# Altium PCB PCB1.PcbDoc
Units mil, origin at the board's own origin, x right, y up, seen from the top; angles counter-clockwise.
Board outline 3540 x 3540 mil, 2 copper layers (Top Layer, Bottom Layer), stack 60.4 mil thick; 35 components, 15 nets, 173 pads, 5 vias.
Unrouted connection lines stored in the file: 81.
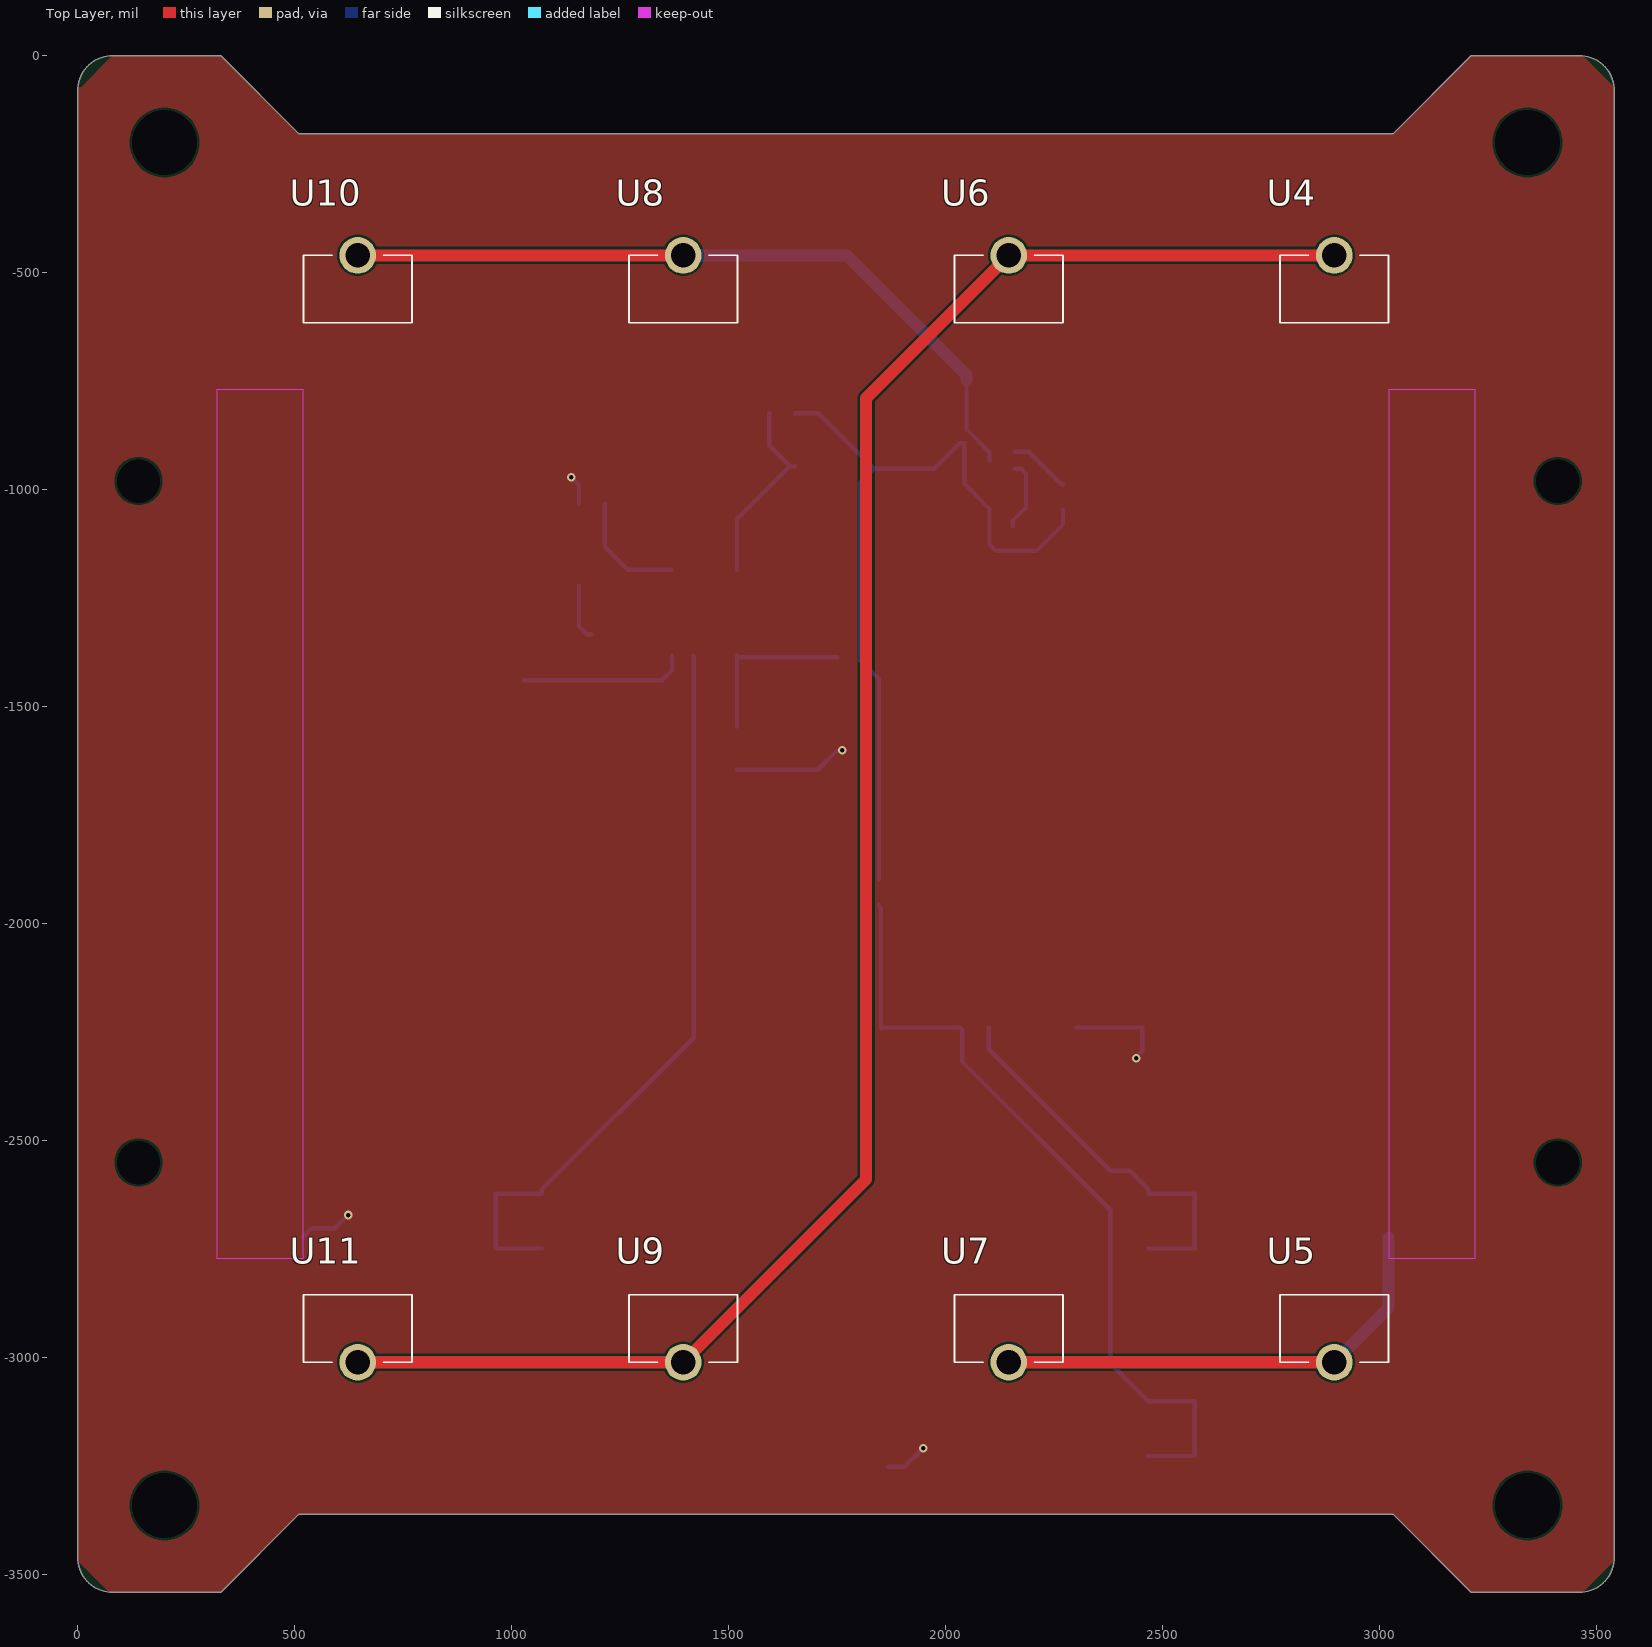
[diagram p0: Top Layer view]
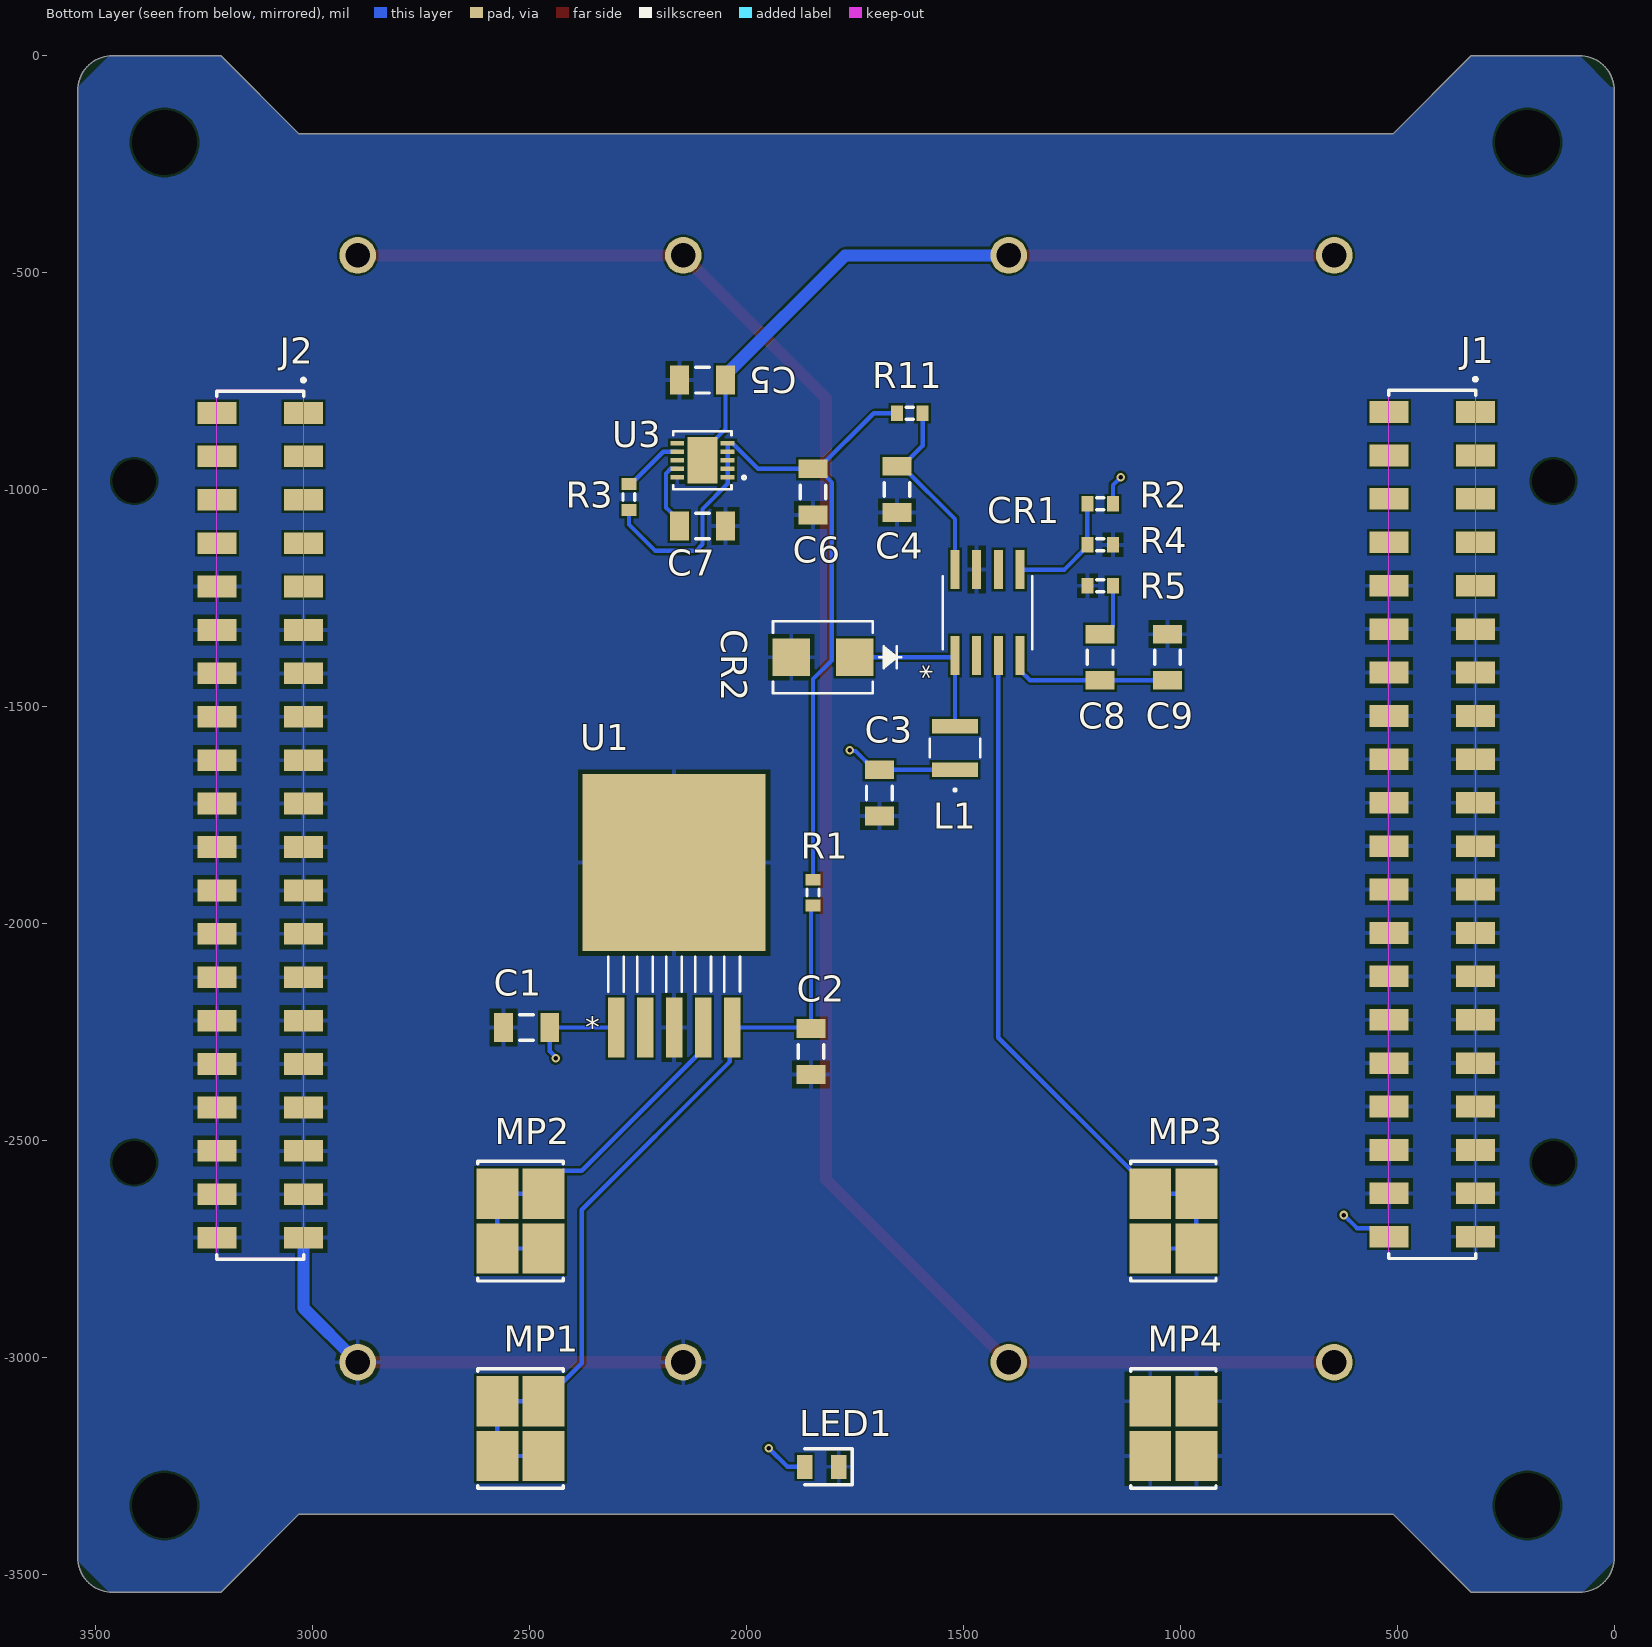
[diagram p1: Bottom Layer view, seen from below]

## Layer stack, top to bottom
Top Solder: solder mask 0.5, Solder Resist, Dk 3.3
Top Layer: signal copper 0.7
Dielectric1: core 59, FR-4, Dk 4.3
Bottom Layer: signal copper 0.7
Bottom Solder: solder mask 0.5, Solder Resist, Dk 3.3

## Board outline
3210,-3540 3030,-3360 510,-3360 330,-3540 80,-3540 cw(c80,-3460) 0,-3460 0,-80 cw(c80,-80) 80,0 330,0 510,-180 3030,-180 3210,0 3460,0 cw(c3460,-80) 3540,-80 3540,-3460 cw(c3460,-3460) 3460,-3540

## Design rules (kind name [scope] priority, off if disabled: settings)
Clearance [All] p1: gap=5 ignorepadtopadclearanceinfootprint=FALSE
DiffPairsRouting [All] p1: maxlimit=10 minlimit=10 mostfreqgap=10 toplayer_minwidth=10 toplayer_maxwidth=10 toplayer_prefwidth=10 bottomlayer_minwidth=10 bottomlayer_maxwidth=10 bottomlayer_prefwidth=10 maxuncoupledlength=500
HoleSize [All] p1: absolutevalues=TRUE maxlimit=300 minlimit=10 maxpercent=80.000 minpercent=20.000
MinimumAnnularRing [All] p1: minimumring=5
MinimumSolderMaskSliver [All] p1: minsoldermaskwidth=2.5
PasteMaskExpansion [All] p1: expansion=10
PlaneClearance [All] p1: clearance=15
PlaneConnect [All] p1: pad.planeconnectstyle=Relief pad.reliefexpansion=20 pad.reliefentries=4 pad.reliefconductorwidth=10 pad.reliefairgap=10 via.planeconnectstyle=Direct via.reliefexpansion=20 via.reliefentries=4 via.reliefconductorwidth=10 via.reliefairgap=10
PolygonConnect [All] p1: thpad.connectstyle=Relief thpad.reliefconductorwidth=10 thpad.reliefentries=4 thpad.polygonreliefangle="90 Angle" thpad.airgapwidth=10 smdpad.connectstyle=Relief smdpad.reliefconductorwidth=10 smdpad.reliefentries=4 smdpad.polygonreliefangle="90 Angle" smdpad.airgapwidth=10 via.connectstyle=Direct via.reliefconductorwidth=10 via.reliefentries=4 via.polygonreliefangle="90 Angle" via.airgapwidth=10
RoutingVias [All] p1: holewidth=10 width=20 viastyle="Through Hole" minholewidth=10 minwidth=20 maxholewidth=30 maxwidth=40
SMDNeckDown [All] p1: percent=100.000
SilkToSilkClearance [All] p1: silktosilkclearance=8
SilkToSolderMaskClearance SilkscreenOverComponentPads [IsPad] p1: minsilkscreentomaskgap=3.5 clearancetoexposedcopper=TRUE
SolderMaskExpansion [All] p1: expansion=10 istentingtop=FALSE
Width [All] p1: maxlimit=28 minlimit=10 preferedwidth=10
22 further rules are at their usual default settings.

## Components (designator, comment, footprint, x,y, rotation, side; value= is the part's Value field where it differs from the comment)
C1 "Cap Semi" C1206 2505.85,-2239 r180 bottom value=10uF
C2 "Cap Semi" C1206 1850.72,-2294 r90 bottom value=0.1uF
C3 "Cap Semi" C1206 1693.16,-1698.15 r90 bottom value=10uF
C4 "Cap Semi" C1206 1652.53,-999.02 r90 bottom value=10uF
C5 "Cap Semi" C1206 2100.72,-747.41 r0 bottom value=10uF
C6 "Cap Semi" C1206 1846,-1004.93 r270 bottom value=47uF
C7 "Cap Semi" C1206 2100.72,-1083.67 r180 bottom value=10uF
C8 "Cap Semi" C1206 1184.46,-1385.82 r270 bottom value=22nF
C9 "Cap Semi" C1206 1029,-1385.82 r270 bottom value=220pF
CR1 "L5970D" SO-8_STM-M 1444,-1282.88 r90 bottom
CR2 "B220-13-F" SMB_DIO 1823.2,-1385.82 r0 bottom
J1 "HLE-120-02-F-DV" SAMTEC_HLE-120-02-F-DV 419.41,-1771 r90 bottom
J2 "HLE-120-02-F-DV" SAMTEC_HLE-120-02-F-DV 3119.41,-1773 r90 bottom
L1 "CBC3225T330KR" IND_TAIYO_CBC3225_TAY 1519,-1594.75 r90 bottom
LED1 "APTD2012LZGCK" LEDC2012X105N 1826,-3251 r0 bottom
MP1 "M3" 7466303 2520,-3163 r180 bottom
MP2 "M3" 7466303 2520,-2685 r180 bottom
MP3 "M3" 7466303 1016,-2685 r180 bottom
MP4 "M3" 7466303 1016,-3163 r180 bottom
R1 "Res3" J1-0603 1846,-1928 r270 bottom value="0 Ohm"
R2 "Res3" J1-0603 1184.46,-1032.49 r0 bottom value=5.6K
R3 "Res3" J1-0603 2270,-1016.74 r270 bottom value=450
R4 "Res3" J1-0603 1184.46,-1127.01 r180 bottom value=3.3K
R5 "Res3" J1-0603 1184.46,-1221 r180 bottom value=4.7K
R11 "Res3" J1-0603 1623,-823.62 r180 bottom value="0 Ohm"
U1 "REG104FA-3.3/500" KTT5_TEX 2166,-1859 r180 bottom
U3 "STEF05PUR" DFN_EF05PUR_STM 2100.72,-932.1 r0 bottom
U4 "1017-1" 10171 2895,-460 r180 top
U5 "1017-1" 10171 2895,-3010 r0 top
U6 "1017-1" 10171 2145,-460 r180 top
U7 "1017-1" 10171 2145,-3010 r0 top
U8 "1017-1" 10171 1395,-460 r180 top
U9 "1017-1" 10171 1395,-3010 r0 top
U10 "1017-1" 10171 645,-460 r180 top
U11 "1017-1" 10171 645,-3010 r0 top

## Footprints (in the part's own frame and the unit in brackets; to place one, negate y for a bottom-side part, rotate by r counter-clockwise, add the part's x,y. Pads: shape width x height; smd on the part's side, far side on the other; paste and mask are expansions set on the pad)
10171 [mm]
  round 2.145 hole 1.43: 1(0,0)
  silkscreen extent -3.18,0 3.17,3.95, body extent -3.18,-0.61 3.17,3.95, height 13.94
7466303 [mm] "SMD Terminal Right Angled, Thread M3, Length 7mm"
  rect 2.45x2.95 smd paste-403.566: 1(-1.35,-1.6) 1(-1.35,1.6) 1(1.35,-1.6) 1(1.35,1.6)
  silkscreen extent -2.5,-3.5 2.5,3.5, body extent -2.5,-3.5 2.5,3.5, height 5
C1206 [mm] "Chip Capacitor, Body 3.2x1.6mm, IPC High Density"
  rect 1.1x1.7 smd: 1(-1.35,0) 2(1.35,0)
  silkscreen extent -0.4,-0.75 0.4,0.75, body extent -1.7,-0.9 1.7,0.9, height 1.3
DFN_EF05PUR_STM [mil]
  rect 32x10 smd paste+0 mask+0: 1(-58,39.38) 2(-58,19.69) 3(-58,0) 4(-58,-19.69) 5(-58,-39.38) 6(58,-39.38) 7(58,-19.69) 8(58,0) 9(58,19.69) 10(58,39.38)
  rect 69x106.3 smd paste+0 mask+0: 11(0,0)
  silkscreen extent -100,-67 67,67, body extent -62,-62 62,62, height 32
IND_TAIYO_CBC3225_TAY [mil]
  rect 33.5x106 smd paste+0 mask+0: 1(-50.25,0) 2(50.25,0)
  silkscreen extent -100,-58 21,58, body extent -68,-53 68,53, height 106
J1-0603 [mm] "Chip Resistor, Body 1.6x0.8mm, IPC High Density"
  rect 0.7x0.9 smd: 1(-0.75,0) 2(0.75,0)
  silkscreen extent -0.2,-0.35 0.2,0.35, body extent -0.85,-0.48 0.85,0.48, height 0.9
KTT5_TEX [mil]
  rect 38x138 smd paste+0 mask+0: 1(-133.86,-380) 2(-66.93,-380) 3(0,-380) 4(66.93,-380) 5(133.86,-380)
  rect 422x408 smd paste+0 mask+0: 6(0,0)
  silkscreen extent -152,-297 152,-217, body extent -210,-293 210,190, height 67
LEDC2012X105N [mm]
  rect 0.9x1.4 smd: 1(-1,0) 2(1,0)
  silkscreen extent -1.8,-1.05 1,1.05, body extent -1.03,-0.63 0.97,0.63, height 1.05
SAMTEC_HLE-120-02-F-DV [mm]
  rect 1.27x2.29 smd: 01(24.13,-2.525) 02(24.13,2.525) 03(21.59,-2.525) 04(21.59,2.525) 05(19.05,-2.525) 06(19.05,2.525) 07(16.51,-2.525) 08(16.51,2.525) 09(13.97,-2.525) 10(13.97,2.525) 11(11.43,-2.525) 12(11.43,2.525) 13(8.89,-2.525) 14(8.89,2.525) 15(6.35,-2.525) 16(6.35,2.525) 17(3.81,-2.525) 18(3.81,2.525) 19(1.27,-2.525) 20(1.27,2.525) 21(-1.27,-2.525) 22(-1.27,2.525) 23(-3.81,-2.525) 24(-3.81,2.525) 25(-6.35,-2.525) 26(-6.35,2.525) 27(-8.89,-2.525) 28(-8.89,2.525) 29(-11.43,-2.525) 30(-11.43,2.525) 31(-13.97,-2.525) 32(-13.97,2.525) 33(-16.51,-2.525) 34(-16.51,2.525) 35(-19.05,-2.525) 36(-19.05,2.525) 37(-21.59,-2.525) 38(-21.59,2.525) 39(-24.13,-2.525) 40(-24.13,2.525)
  silkscreen extent -25.4,-2.62 26.15,2.54
SMB_DIO [mm]
  rect 2.18x2.21 smd paste+0 mask+0: 1(-1.857,0) 2(1.857,0)
  silkscreen extent -4.57,-2.1 2.92,2.1, body extent -2.8,-1.97 2.8,1.97, height 2.45
SO-8_STM-M [mil]
  rect 90x21 smd paste+0 mask+0: 1(-99,75) 2(-99,25) 3(-99,-25) 4(-99,-75) 5(99,-75) 6(99,-25) 7(99,25) 8(99,75)
  silkscreen extent -84,-104 84,104, body extent -122,-99 122,99, height 69

## Part data
C1 C2 C3 C4 C5 C6 C7 C8 C9: "Capacitor (Semiconductor SIM Model)", LatestRevisionDate=29-May-2009, LatestRevisionNote="IPC-7351 Footprint Added.", PackageDescription="Chip Capacitor", PackageReference=C1206, Published=8-Jun-2000, Publisher="Altium Limited"
CR1 U3: "No Description Available", Mfr_Name=STMicroelectronics, Copyright="Copyright (C) 2022 Ultra Librarian. All rights reserved.", RefDes=RefDes, Type=DEV
  CR1: Digi-Key_Part_Number_1=497-1415-5-ND, Manufacturer_Part_Number=L5970D
  U3: Digi-Key_Part_Number_1=497-11265-2-ND, Digi-Key_Part_Number_2=497-11265-1-ND, Digi-Key_Part_Number_3=497-11265-6-ND, Manufacturer_Part_Number=STEF05PUR
CR2: "No Description Available", Mfr_Name="Diodes Inc", Copyright="Copyright (C) 2022 Ultra Librarian. All rights reserved.", Digi-Key_Part_Number_1=B220-FDICT-ND, Digi-Key_Part_Number_2=B220-FDIDKR-ND, Digi-Key_Part_Number_3=B220-FDITR-ND, Manufacturer_Part_Number=B220-13-F, RefDes=RefDes, Type=DEV
J1 J2: "Connector", Manufacturer_Name=SAMTEC, Arrow Part Number=HLE-120-02-F-DV, Arrow Price/Stock=https://www.arrow.com/en/products/hle-120-02-f-dv/samtec, Datasheet Link=http://suddendocs.samtec.com/prints/hle-1xx-02-xxx-dv-xx-xx-xx-mkt.pdf, Manufacturer_Part_Number=HLE-120-02-F-DV
L1: "No Description Available", Mfr_Name="Taiyo Yuden", Copyright="Copyright (C) 2022 Ultra Librarian. All rights reserved.", Digi-Key_Part_Number_1=587-3068-1-ND, Digi-Key_Part_Number_2=587-3068-2-ND, Digi-Key_Part_Number_3=587-3068-6-ND, Manufacturer_Part_Number=CBC3225T330KR, RefDes=RefDes, Type=DEV
LED1: "LED", Manufacturer_Name=Kingbright, Mouser2 Part Number=604-APTD2012LZGCK, Datasheet Link=https://componentsearchengine.com//APTD2012LZGCK.pdf, Height=1.05mm, Manufacturer_Part_Number=APTD2012LZGCK, Mouser2 Price/Stock=https://www.mouser.com/Search/Refine.aspx?Keyword=604-APTD2012LZGCK
MP1 MP2 MP3 MP4: library part 7466303, "WP-SMRA REDCUBE SMT Right Angled without pins, M3, 50A", Manufacturer="Wurth Elektronik", Operating Temperature Max=150°C, Operating Temperature Min=-55°C, Rated Current=50A, Category="REDCUBE SMT", ComponentLink1Description="Website Link", ComponentLink1URL=https://www.we-online.com/redexpert/article/7466303?ad, ComponentLink2Description="Datasheet Link", ComponentLink2URL=https://www.we-online.com/redexpert/spec/7466303?ad, Height=5mm, Manufacturer Part Number=7466303, Match Code=WP-SMRA, Material=Brass, Mount="Surface Mount", Packaging=Bulk, Surface=Tin, Thread Size=M3
R1 R2 R3 R4 R5 R11: "Resistor", LatestRevisionDate=29-May-2009, LatestRevisionNote="IPC-7351 Footprint Added.", PackageDescription="Chip Resistor", PackageReference=J1-0603, Published=8-Jun-2000, Publisher="Altium Limited"
U1: "No Description Available", Mfr_Name="Texas Instruments", Copyright="Copyright (C) 2022 Ultra Librarian. All rights reserved.", Digi-Key_Part_Number_1=2156-REG104FA-3.3/500-ND, Digi-Key_Part_Number_2=2156-REG104FA-3.3/500-TI-ND, Digi-Key_Part_Number_3=296-REG104FA-3.3/500CT-ND, Digi-Key_Part_Number_4=296-REG104FA-3.3/500DKR-ND, Digi-Key_Part_Number_5=296-REG104FA-3.3/500TR-ND, Digi-Key_Part_Number_6=REG104FA-3.3CT-ND, Digi-Key_Part_Number_7=REG104FA-3.3DKR-ND, Digi-Key_Part_Number_8=REG104FA-3.3TR-ND, Manufacturer_Part_Number=REG104FA-3.3/500, RefDes=RefDes, Type=DEV
U4 U5 U6 U7 U8 U9 U10 U11: "Undefined or Miscellaneous", Manufacturer_Name="Keystone Electronics", Mouser Part Number=534-1017-1, Datasheet Link=https://componentsearchengine.com/Datasheets/1/1017-1.pdf, Height=13.84mm, Manufacturer_Part_Number=1017-1, Mouser Price/Stock=https://www.mouser.co.uk/ProductDetail/Keystone-Electronics/1017-1?qs=wOxb8XianXhq6%252BfB2t0c2Q%3D%3D

## Free pads (board coordinates)
  round 60 hole 150: 9(200,-200) 10(3340,-200) 11(3340,-3340) 12(200,-3340)
  round 60 hole 100: 13(140,-980) 14(140,-2550) 15(3410,-980) 16(3410,-2550)

## Via types
v1: diameter 20, hole 10, Top Layer to Bottom Layer, 5 vias

## Nets (pads, with @x,y where several pads share a name; then routed paths per layer and width w, separated by ;. In a path a pad name is that pad's centre, name@x,y a point inside that pad or via, vN(x,y) a via of type N, cw(c..) or ccw(c..) an arc to the next point about the centre after c; other vN are vias at no path point)
GND: C1.1 C2.1 C3.1 C4.1 C5.2 C6.2 C7.2 C9.1 CR1.7 CR2.2 J1.10 J1.11 J1.12 J1.13 J1.14 J1.15 J1.16 J1.17 J1.18 J1.19 J1.20 J1.21 J1.22 J1.23 J1.24 J1.25 J1.26 J1.27 J1.28 J1.29 J1.30 J1.31 J1.32 J1.33 J1.34 J1.35 J1.36 J1.37 J1.38 J1.39 J2.10 J2.11 J2.12 J2.13 J2.14 J2.15 J2.16 J2.17 J2.18 J2.19 J2.20 J2.21 J2.22 J2.23 J2.24 J2.25 J2.26 J2.27 J2.28 J2.29 J2.30 J2.31 J2.32 J2.33 J2.34 J2.35 J2.36 J2.37 J2.38 J2.39 J2.40 LED1.1 MP4.1 R4.2 R5.1 U1.3 U1.6 U3.10 U5.1 U7.1 | length 1088.8
  Top Layer w28: U7.1 U5.1
  Bottom Layer w28: U5.1 3020,-2885 J2.39
NetC2_2: C2.2 MP1.1 R1.2 U1.5 | length 1847.1
  Bottom Layer w10: R1.2 1850.72,-1962.24 C2.2 1852.57,-2239 U1.5 2037.45,-2244.3 2037.45,-2317.14 2379,-2658.7 2379,-3012.16 2466.85,-3100.01 2573.15,-3100.01 2573.15,-3225.99 MP1.1@2466.85,-3225.99
NetC4_2: C4.2 CR1.8 R11.2 | length 442.1
  Bottom Layer w10: CR1.8 1519,-1067.59 C4.2@1640.72,-945.88 ; R11.2 1593.47,-898.63 C4.2@1640.72,-945.88 ; C4.2 C4.2@1640.72,-945.88
NetC5_1: C5.1 U3.11 U8.1 U10.1 | length 1735.2
  Top Layer w28: U10.1 U8.1
  Bottom Layer w10: C5.1 2047.57,-860.3 2100.72,-913.45 U3.11
  Bottom Layer w28: U8.1 1771.97,-460 2047.57,-735.6 C5.1
NetC6_1: C6.1 R1.1 R3.2 R11.1 U3.1 U3.2 U3.3 U3.4 U3.5 | length 1937
  Bottom Layer w10: R11.1 1706.03,-823.62 C6.1@1834.19,-951.78 ; R1.1 1846,-1436.07 1803,-1393.07 1803,-1338.17 1802.54,-1337.71 1802.54,-983.43 C6.1@1834.19,-951.78 ; R3.2 2270,-1080 2209.21,-1140.79 2115.85,-1140.79 2100.72,-1125.65 2100.72,-1044.3 2042.72,-986.3 U3.1 U3.2 U3.3 U3.4 U3.5 2031.72,-892.72 1972.65,-951.78 C6.1 C6.1@1834.19,-951.78
NetC7_1: C7.1 U3.9 | length 164.5
  Bottom Layer w10: C7.1 2153.87,-1071.86 2184.72,-1041.01 2184.72,-962.33 2174.17,-951.79 U3.9
NetC8_1: C8.1 R5.2 | length 130.8
  Bottom Layer w10: R5.2 1154.93,-1314.95 1172.65,-1332.67 C8.1
NetC8_2: C8.2 C9.2 CR1.4 | length 383.9
  Bottom Layer w10: C9.2 C8.2 1346.41,-1438.97 1369,-1416.38 CR1.4
NetCR1_1: CR1.1 CR2.1 L1.2 | length 395.3
  Bottom Layer w10: L1.2 CR1.1 1522.94,-1385.82 CR2.1
NetCR1_3: CR1.3 MP3.1 | length 1723.6
  Bottom Layer w10: MP3.1@1069.15,-2747.99 962.85,-2747.99 962.85,-2622.01 1069.15,-2622.01 1069.15,-2612.17 1419,-2262.32 CR1.3
NetCR1_5: CR1.5 R2.2 R4.1 | length 275.4
  Bottom Layer w10: R2.2 R4.1 1213.98,-1130.95 1266.92,-1183.88 CR1.5
NetMP2_1: MP2.1 U1.4 | length 900.1
  Bottom Layer w10: U1.4 2099.07,-2289 2379.01,-2568.94 2423.62,-2568.94 2466.85,-2612.17 2466.85,-2622.01 2573.15,-2622.01 2573.15,-2747.99 MP2.1@2466.85,-2747.99
NetR3_1: R3.1 U3.7 | length 142.3
  Bottom Layer w10: U3.7 2191.25,-912.41 2266.06,-987.21 R3.1
NetU4_1: U4.1 U6.1 U9.1 U11.1 | length 4360.7
  Top Layer w28: U11.1 U9.1 1816.47,-2588.53 1816.47,-788.53 U6.1 U4.1
VCC: C1.2 C3.2 J1.40 L1.1 LED1.2 R2.1 U1.1 | length 781.5
  Bottom Layer w10: J1.40 538.82,-2701 593,-2701 v1(623,-2671) ; v1(1137.21,-971.48) 1154.93,-989.19 R2.1 ; L1.1 C3.2 1704.97,-1645 1748.05,-1601.91 1759.09,-1601.91 v1(1761,-1600) ; LED1.2@1867.5,-3251 1905,-3251 v1(1948,-3208) ; U1.1 C1.2 2452.7,-2293.26 2438.92,-2307.04 v1(2438.92,-2309.75)
pads on no net: CR1.2 CR1.6 J1.01 J1.02 J1.03 J1.04 J1.05 J1.06 J1.07 J1.08 J1.09 J2.01 J2.02 J2.03 J2.04 J2.05 J2.06 J2.07 J2.08 J2.09 U1.2 U3.6 U3.8

## Polygon pours and split planes (outlines as drawn)
VCC on Top Layer "VCC_L01_P000" (solid, pour order 0): 7.88,-72.12 0,-72.12 0,-3467.88 72.12,-3540 330,-3540 510,-3360 3030,-3360 3210,-3540 3467.88,-3540 3540,-3467.88 3540,-72.12 3467.88,0 3210,0 3030,-180 510,-180 330,0 80,0
GND on Bottom Layer "GND_L02_P002" (solid, pour order 2): 80,0 7.88,-72.12 0,-72.12 0,-3467.88 72.12,-3540 330,-3540 510,-3360 3030,-3360 3210,-3540 3467.88,-3540 3540,-3467.88 3540,-72.12 3467.88,0 3210,0 3030,-180 510,-180 330,0

## Keep-outs
Keep-Out Layer:
  rectangle: 320,-2770 520,-770
  rectangle: 3020,-2770 3220,-770

## Text inside footprints (layer, text, board x,y; h text height)
CR1: Bottom Overlay "*" at 1549.5,-1436.07 h50 r270; Bottom Assembly "*" at 1489.5,-1359.38 h50 r270
U1: Bottom Overlay "*" at 2370.82,-2264 h50; Bottom Assembly "*" at 2312.36,-2064 h50